# Altium PCB ControlBoard_PCB.PcbDoc
Units mm, origin at the board's own origin, x right, y up, seen from the top; angles counter-clockwise.
Board outline 152.4 x 101.6 mm, 2 copper layers (Top Layer, Bottom Layer); 23 components, 19 nets, 94 pads, 5 vias.
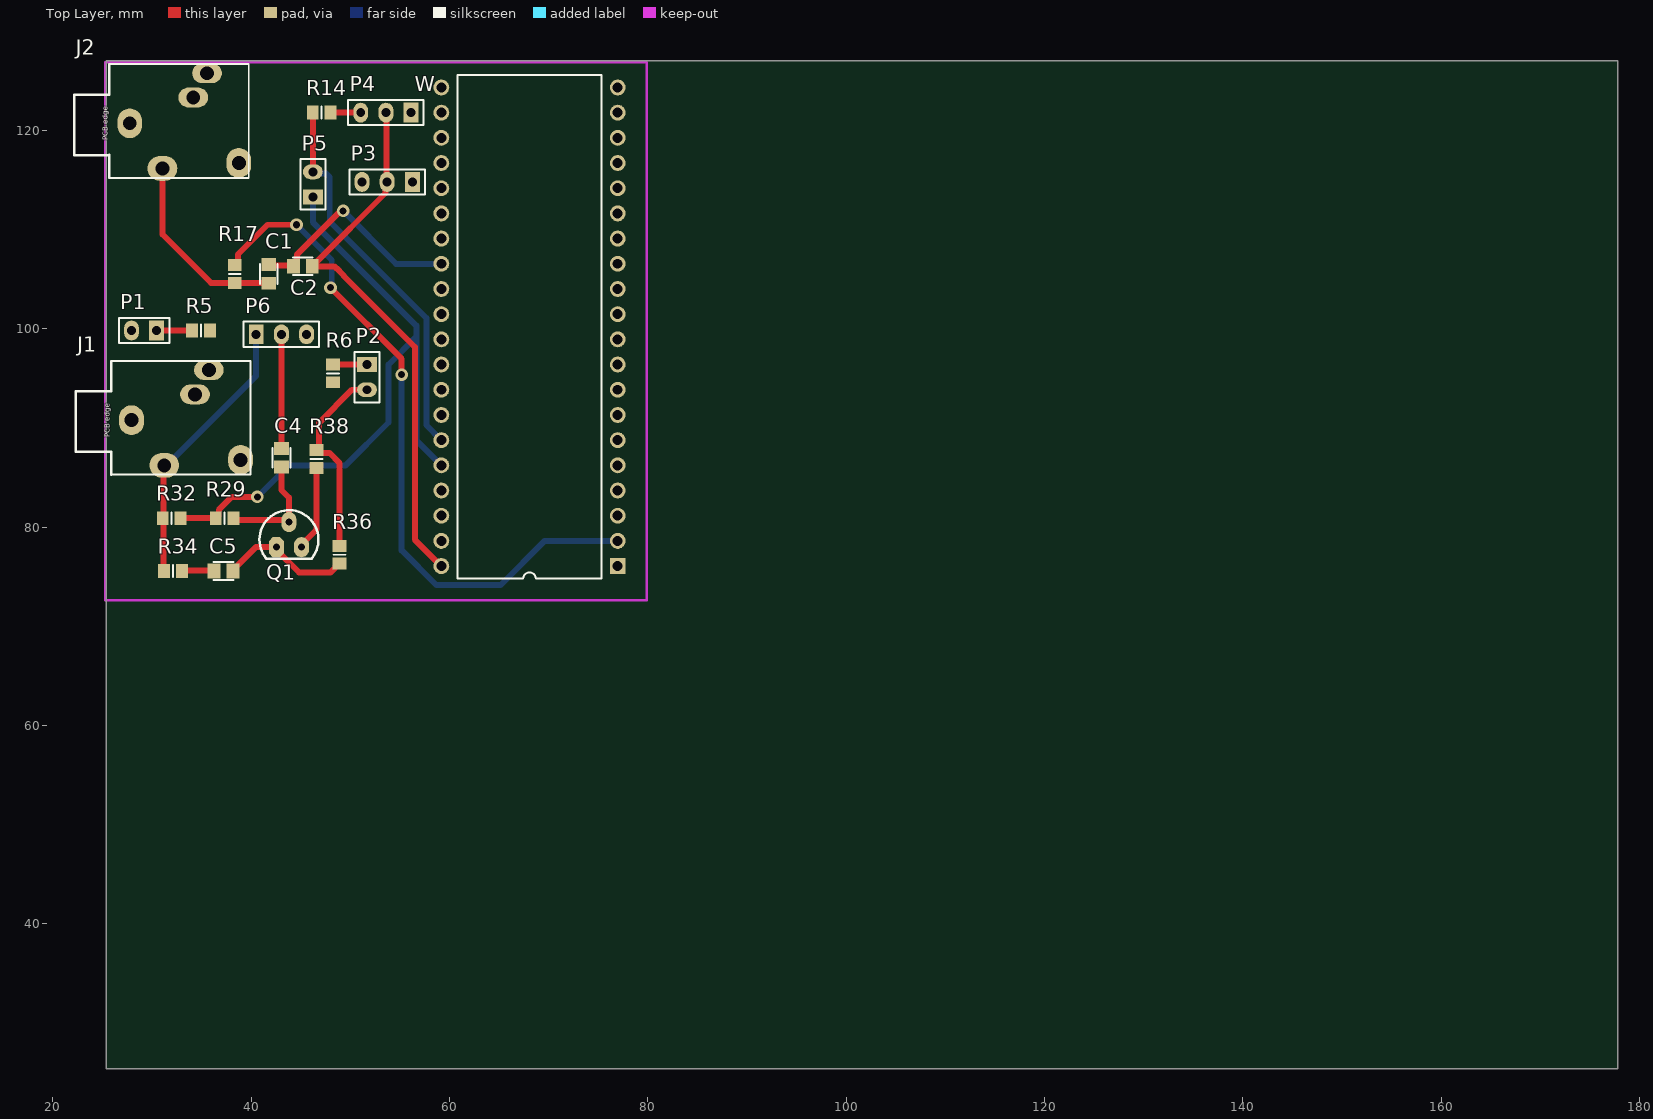
[diagram p0: Top Layer view]
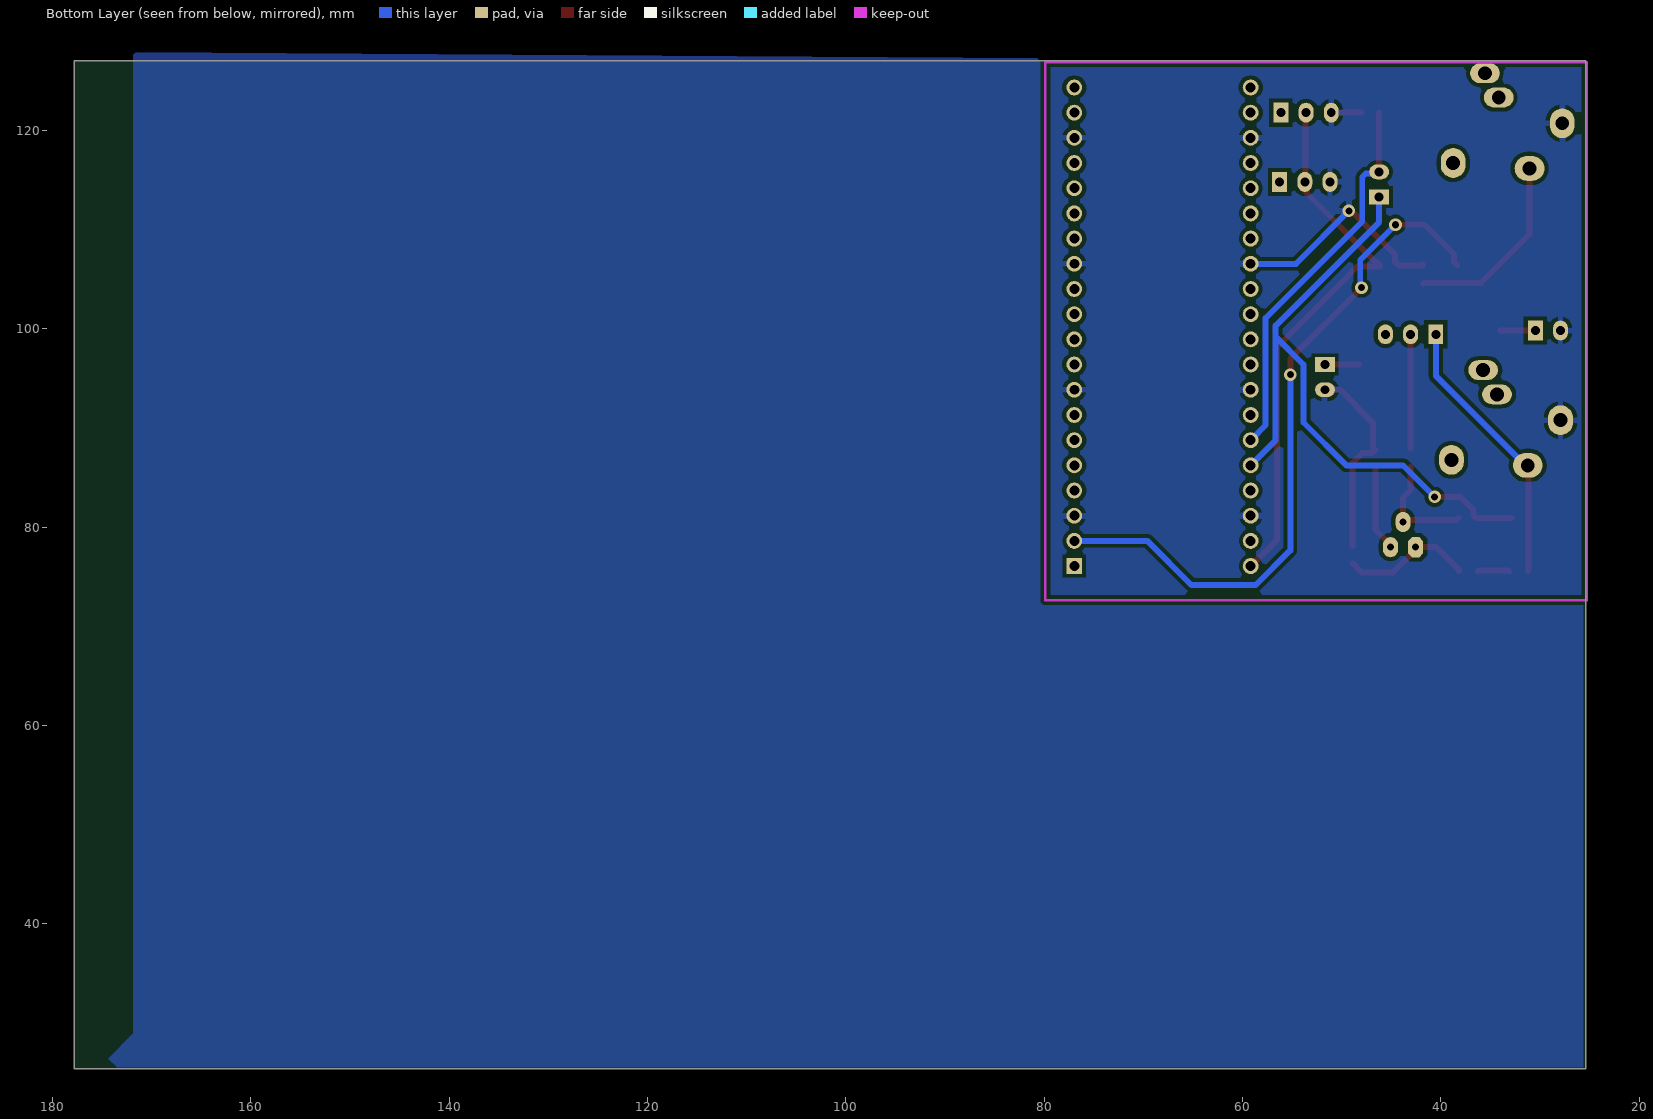
[diagram p1: Bottom Layer view, seen from below]
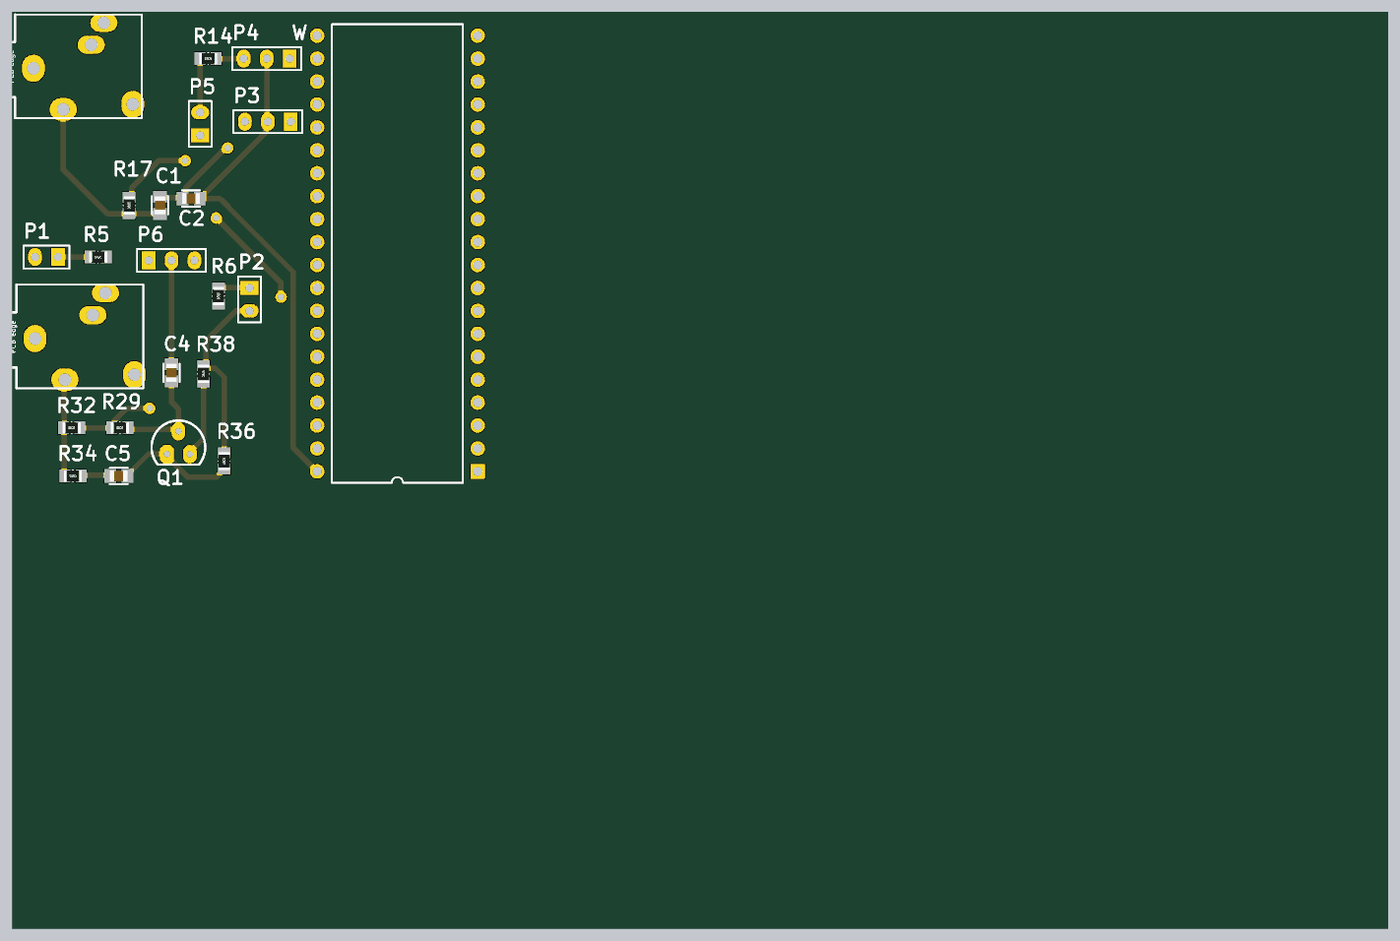
[diagram p2: 3D render of the assembled board from above, using the file's embedded part models]

## Layer stack, top to bottom
Top Solder: solder mask 0.0102, Solder Resist, Dk 3.5
Top Layer: signal copper 0.0356
Dielectric 1: dielectric 0.32, FR-4, Dk 4.8
Bottom Layer: signal copper 0.0356
Bottom Solder: solder mask 0.0102, Solder Resist, Dk 3.5

## Board outline
25.4,25.4 177.8,25.4 177.8,127 25.4,127
board region "Cavity : J1": 22.317,93.683 25.917,93.683 25.917,87.583 22.317,87.583
board region "Cavity : J2": 22.138,123.617 25.738,123.617 25.738,117.517 22.138,117.517
board region "Default Layer Stack Region": 25.4,25.4 177.8,25.4 177.8,127 25.4,127

## Design rules (kind name [scope] priority, off if disabled: settings)
Clearance [All] p1: gap=0.4 ignorepadtopadclearanceinfootprint=FALSE
Height [All] p1: minheight=0 maxheight=20 prefheight=12.7
HoleSize [All] p1: absolutevalues=TRUE maxlimit=10 minlimit=0.4 maxpercent=80.000 minpercent=20.000
PolygonConnect [All] p1: connectstyle=Relief reliefconductorwidth=0.6 reliefentries=4 polygonreliefangle="90 Angle" airgapwidth=0.4
RoutingVias [All] p1: holewidth=0.711 width=1.27 viastyle="Through Hole" minholewidth=0.711 minwidth=1.27 maxholewidth=0.711 maxwidth=1.27
SilkToSilkClearance [All] p1: silktosilkclearance=0.1
SilkToSolderMaskClearance [IsPad] p1: minsilkscreentomaskgap=0 clearancetoexposedcopper=TRUE
SolderMaskExpansion [All] p1: expansion=0.102 istentingtop=FALSE
SupplyNets "Schematic Supply Nets_2" [InNet('VCC')] p1: voltage=0.000
SupplyNets "Schematic Supply Nets_1" [InNet('3V3')] p2: voltage=0.000
SupplyNets "Schematic Supply Nets" [InNet('GND')] p3: voltage=0.000
Width [All] p1: maxlimit=10 minlimit=0.4 preferedwidth=0.6
26 further rules are at their usual default settings.

## Components (designator, comment, footprint, x,y, rotation, side; value= is the part's Value field where it differs from the comment)
C1 "*" ece-CC2012-0805 41.783,105.537 r90 top
C2 "*" ece-CC2012-0805 45.212,106.299 r180 top
C4 "*" ece-CC2012-0805 43.053,86.995 r90 top
C5 "*" ece-CC2012-0805 37.211,75.565 r0 top
J1 "Phonejack Stereo" ECE-phonejackStereo 27.942,90.783 r0 top
J2 "Phonejack Stereo" ECE-phonejackStereo 27.763,120.717 r0 top
P1 "Header 2" ece-HDR1X2 30.48,99.822 r180 top
P2 "Header 2" ece-HDR1X2 51.689,96.393 r270 top
P3 "Header 3" ece-HDR1X3 56.261,114.808 r180 top
P4 "Header 3" ece-HDR1X3 56.134,121.793 r180 top
P5 "Header 2" ece-HDR1X2 46.228,113.284 r90 top
P6 "Header 3" ece-HDR1X3 40.513,99.441 r0 top
Q1 "BF245" ece-TO-92 42.545,77.978 r0 top
R5 "*" RESC2012-0805SM 34.936,99.822 r180 top
R6 "*" RESC2012-0805SM 48.26,95.504 r90 top
R14 "*" RESC2012-0805SM 47.117,121.793 r0 top
R17 "*" RESC2012-0805SM 38.354,105.526 r90 top
R29 "*" RESC2012-0805SM 37.338,80.899 r0 top
R32 "*" RESC2012-0805SM 31.993,80.899 r0 top
R34 "*" RESC2012-0805SM 32.131,75.565 r180 top
R36 "*" RESC2012-0805SM 48.895,77.216 r90 top
R38 "*" RESC2012-0805SM 46.609,86.868 r90 top
W "PICO 2 W" DIP40 76.962,76.073 r180 top

## Footprints (in the part's own frame and the unit in brackets; to place one, negate y for a bottom-side part, rotate by r counter-clockwise, add the part's x,y. Pads: shape width x height; smd on the part's side, far side on the other; paste and mask are expansions set on the pad)
DIP40 [mm]
  rect 1.6x1.6 hole 1: 1(0,0)
  round 1.6 hole 1: 2(0,-2.54) 3(0,-5.08) 4(0,-7.62) 5(0,-10.16) 6(0,-12.7) 7(0,-15.24) 8(0,-17.78) 9(0,-20.32) 10(0,-22.86) 11(0,-25.4) 12(0,-27.94) 13(0,-30.48) 14(0,-33.02) 15(0,-35.56) 16(0,-38.1) 17(0,-40.64) 18(0,-43.18) 19(0,-45.72) 20(0,-48.26) 21(17.78,-48.26) 22(17.78,-45.72) 23(17.78,-43.18) 24(17.78,-40.64) 25(17.78,-38.1) 26(17.78,-35.56) 27(17.78,-33.02) 28(17.78,-30.48) 29(17.78,-27.94) 30(17.78,-25.4) 31(17.78,-22.86) 32(17.78,-20.32) 33(17.78,-17.78) 34(17.78,-15.24) 35(17.78,-12.7) 36(17.78,-10.16) 37(17.78,-7.62) 38(17.78,-5.08) 39(17.78,-2.54) 40(17.78,0)
  silkscreen extent 1.63,-49.53 16.15,1.27
ece-CC2012-0805 [mm] "SM capacitor 0805"
  rect 1.3x1.5 smd: 1(-0.95,0) 2(0.95,0)
  silkscreen extent -1,-0.9 1,0.9, body extent -1,-0.6 1,0.6, height 1.2
ece-HDR1X2 [mm] "Header 2 way"
  rect 1.5x2 hole 0.9: 1(0,0)
  oval 1.5x2 hole 0.9: 2(2.54,0)
  silkscreen extent -1.27,-1.27 3.81,1.27
ece-HDR1X3 [mm] "Header 3 way"
  rect 1.5x2 hole 0.9: 1(0,0)
  oval 1.5x2 hole 0.9: 2(2.54,0) 3(5.08,0)
  silkscreen extent -1.27,-1.27 6.35,1.27
ECE-phonejackStereo [mm]
  oval 2.5x3 hole 1.4: 1(0,0) 4(11,-4)
  oval 3x2.5 hole 1.4: 2(3.3,-4.55)
  oval 3x2 hole 1.4: 3(7.8,5.05) 5(6.4,2.6)
  silkscreen extent -5.6,-5.5 12,5.97
ece-TO-92 [mil]
  oct 60x80 hole 27.56: 1(0,0)
  oval 60x80 hole 27.56: 2(50,100) 3(100,0)
  silkscreen extent -67,-45 167,147
RESC2012-0805SM [mm] "Chip Resistor, Body 2.0x1.3mm, IPC Medium Density"
  rect 1.2x1.4 smd: 1(-0.9,0) 2(0.9,0)
  silkscreen extent 0,-0.6 0,0.6, body extent -1,-0.62 1,0.63, height 0.5

## Part data
C1 C2 C4 C5: library part "CAP SM0805", "SM capacitor"
J1 J2: library part Phonejack-Stereo
P1 P2 P5: "Header, 2-Pin", LatestRevisionDate=17-Jul-2002, LatestRevisionNote="Re-released for DXP Platform.", Publisher="Altium Limited"
P3 P4 P6: "Header, 3-Pin", LatestRevisionDate=17-Jul-2002, LatestRevisionNote="Re-released for DXP Platform.", Publisher="Altium Limited"
Q1: "N channel SFET"
R5 R6 R14 R17 R29 R32 R34 R36 R38: library part "Res SM 0805", "SM resistor"
W: library part CMP-020-00023-1, "The PICO 2 W throughhole symbol thing", Case/Package=DIP40

## Via types
v1: diameter 1.27, hole 0.711, Top Layer to Bottom Layer, 5 vias

## Nets (pads, with @x,y where several pads share a name; then routed paths per layer and width w, separated by ;. In a path a pad name is that pad's centre, name@x,y a point inside that pad or via, vN(x,y) a via of type N, cw(c..) or ccw(c..) an arc to the next point about the centre after c; other vN are vias at no path point)
3V3: P5.1 R29.1 R32.2 W.36 | length 67.5
  Top Layer w0.6: R32.2 R29.1 36.738,81.199 36.738,81.748 38.048,83.058 v1(40.64,83.058)
  Bottom Layer w0.6: v1(40.64,83.058) 43.815,86.233 49.53,86.233 53.848,90.551 53.848,96.379 56.663,99.193 ; P5.1 46.228,110.744 56.663,100.309 56.663,99.193 ; W.36 56.663,88.752 56.663,99.193
AUDIO_IN: P6.3
AUDIO_PWM: R17.2 W.2 | length 70.8
  Top Layer w0.6: R17.2 38.359,106.426 38.659,106.726 38.659,107.493 41.656,110.49 v1(44.577,110.49) ; v1(48.006,104.14) 55.183,96.963 v1(55.183,95.377)
  Bottom Layer w0.6: v1(44.577,110.49) 48.133,106.934 48.133,104.267 v1(48.006,104.14) ; v1(55.183,95.377) 55.18,95.374 55.18,77.663 58.674,74.168 65.158,74.168 69.603,78.613 W.2
GND: C1.2 C2.2 J1.1 J2.1 P1.2 P2.2 P3.3 P4.3 R14.2 R36.2 R38.2 W.3 W.8 W.13 W.18 W.23 W.28 W.33 W.38 | length 45.7
  Top Layer w0.6: C1.2 41.877,106.393 44.256,106.393 44.612,106.749 44.612,107.477 48.894,111.759 49.148,111.759 v1(49.276,111.887) ; R14.2 P4.3 ; R36.2 48.895,86.487 47.914,87.468 46.909,87.468 R38.2 46.854,88.013 46.854,90.542 50.165,93.853 P2.2
  Bottom Layer w0.6: v1(49.276,111.887) 54.61,106.553 W.28
LED1_DRIVE: R5.1
LED2_DRIVE: R6.1
MIC_IN: J1.2 P6.1 R32.1 R34.2 | length 28
  Top Layer w0.6: R34.2 31.162,75.634 31.162,80.83 R32.1 31.168,80.974 31.168,86.159 J1.2
  Bottom Layer w0.6: J1.2 31.492,86.233 40.513,95.254 P6.1
NetC4_1: C4.1 Q1.2 R29.2 | length 11.6
  Top Layer w0.6: R29.2 38.429,80.709 43.624,80.709 Q1.2 43.815,82.978 43.053,83.74 C4.1
NetC5_1: C5.1 R34.1 | length 3.2
  Top Layer w0.6: R34.1@33.094,75.501 33.221,75.629 36.197,75.629 C5.1
NetC5_2: C5.2 Q1.1 R36.1 | length 13.2
  Top Layer w0.6: C5.2 38.161,75.665 40.474,77.978 Q1.1 ; Q1.1@42.545,77.724 44.831,75.438 48.017,75.438 48.495,75.916 48.495,76.016 48.795,76.316 R36.1
NetP1_1: P1.1 R5.2 | length 3.6
  Top Layer w0.6: P1.1 R5.2
NetP2_1: P2.1 R6.2 | length 3.4
  Top Layer w0.6: R6.2 48.266,96.398 51.684,96.398 P2.1
NetP5_2: P5.2 R14.1 W.35 | length 39.1
  Top Layer w0.6: R14.1 46.223,121.788 46.223,115.829 P5.2
  Bottom Layer w0.6: P5.2 46.4,115.652 47.577,115.652 47.928,115.3 47.928,110.822 57.663,101.087 57.663,90.292 W.35
NetQ1_3: Q1.3 R38.1 | length 8.6
  Top Layer w0.6: Q1.3 45.085,78.232 46.609,79.756 R38.1
PREAMP_IN: C4.2 P6.2 | length 11.5
  Top Layer w0.6: C4.2 P6.2
SERVO1_DRIVE: P3.1
SERVO2_DRIVE: P4.1
SPEAKER_OUT: C1.1 J2.2 R17.1 | length 19.4
  Top Layer w0.6: J2.2 31.063,109.526 35.963,104.626 R17.1 38.374,104.606 41.763,104.606 C1.1
VCC: C2.1 P3.2 P4.2 W.40 | length 55.7
  Top Layer w0.6: P4.2 53.657,121.73 53.657,114.871 P3.2 53.549,114.636 53.549,113.686 46.612,106.749 46.512,106.749 46.162,106.399 C2.1 48.387,106.299 48.595,106.091 48.625,106.091 49.322,105.394 49.322,105.364 56.518,98.168 56.518,78.737 W.40
pads on no net: J1.3 J1.4 J1.5 J2.3 J2.4 J2.5 W.1 W.4 W.5 W.6 W.7 W.9 W.10 W.11 W.12 W.14 W.15 W.16 W.17 W.19 W.20 W.21 W.22 W.24 W.25 W.26 W.27 W.29 W.30 W.31 W.32 W.34 W.37 W.39

## Polygon pours and split planes (outlines as drawn)
GND on Bottom Layer "GND_L02_P000" (solid, pour order 0): 25.654,126.873 25.654,25.527 173.482,25.527 174.371,26.416 171.831,28.956 171.831,127.889

## Keep-outs
Keep-Out Layer:
  lines w0.254: 25.316,72.644 79.883,72.644 79.883,126.896 25.316,126.896 25.316,72.644

## Text inside footprints (layer, text, board x,y; h text height)
J1: Top Overlay "PCB edge" at 25.742,89.083 h0.5 r90
J2: Top Overlay "PCB edge" at 25.563,119.017 h0.5 r90